# Altium PCB 对射光电IC款-RX接收-测试PCB-20260121.PcbDoc
Units mil, origin at the board's own origin, x right, y up, seen from the top; angles counter-clockwise.
Board outline 2124.44 x 1294.09 mil, 2 copper layers (Top, Bottom), stack 12.7 mil thick; 65 components, 34 nets, 170 pads, 83 vias.
Unrouted connection lines stored in the file: 95.
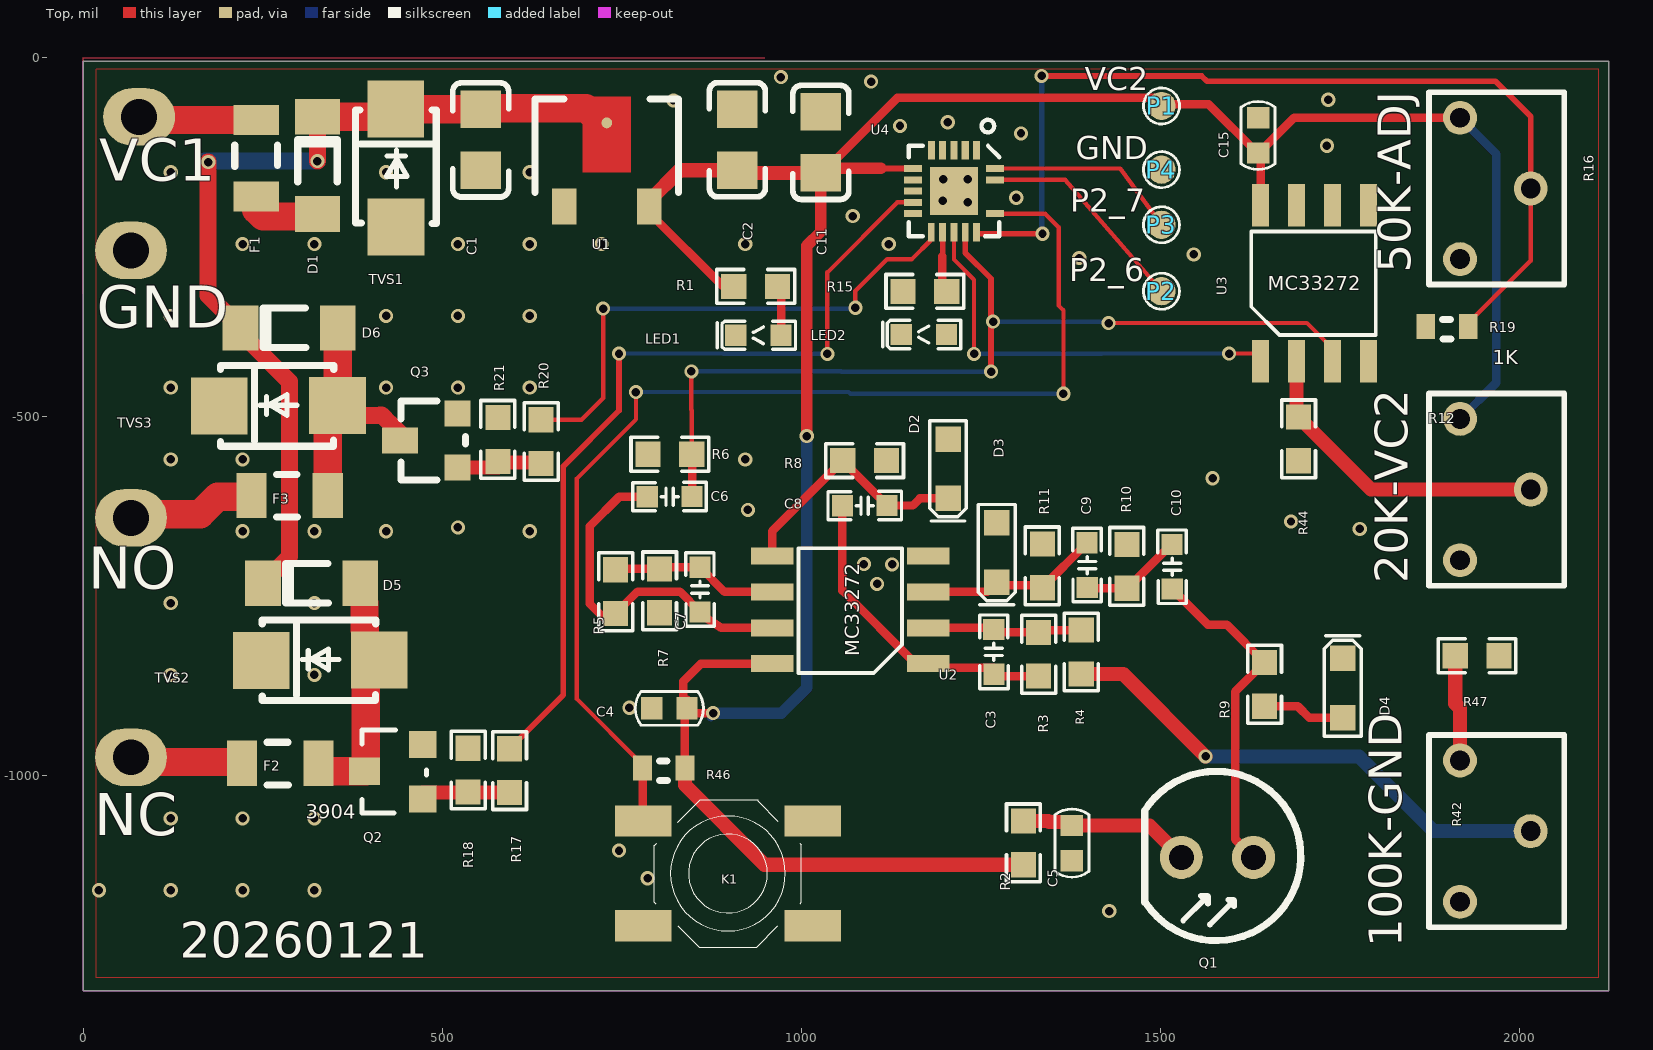
[diagram p0: Top view]
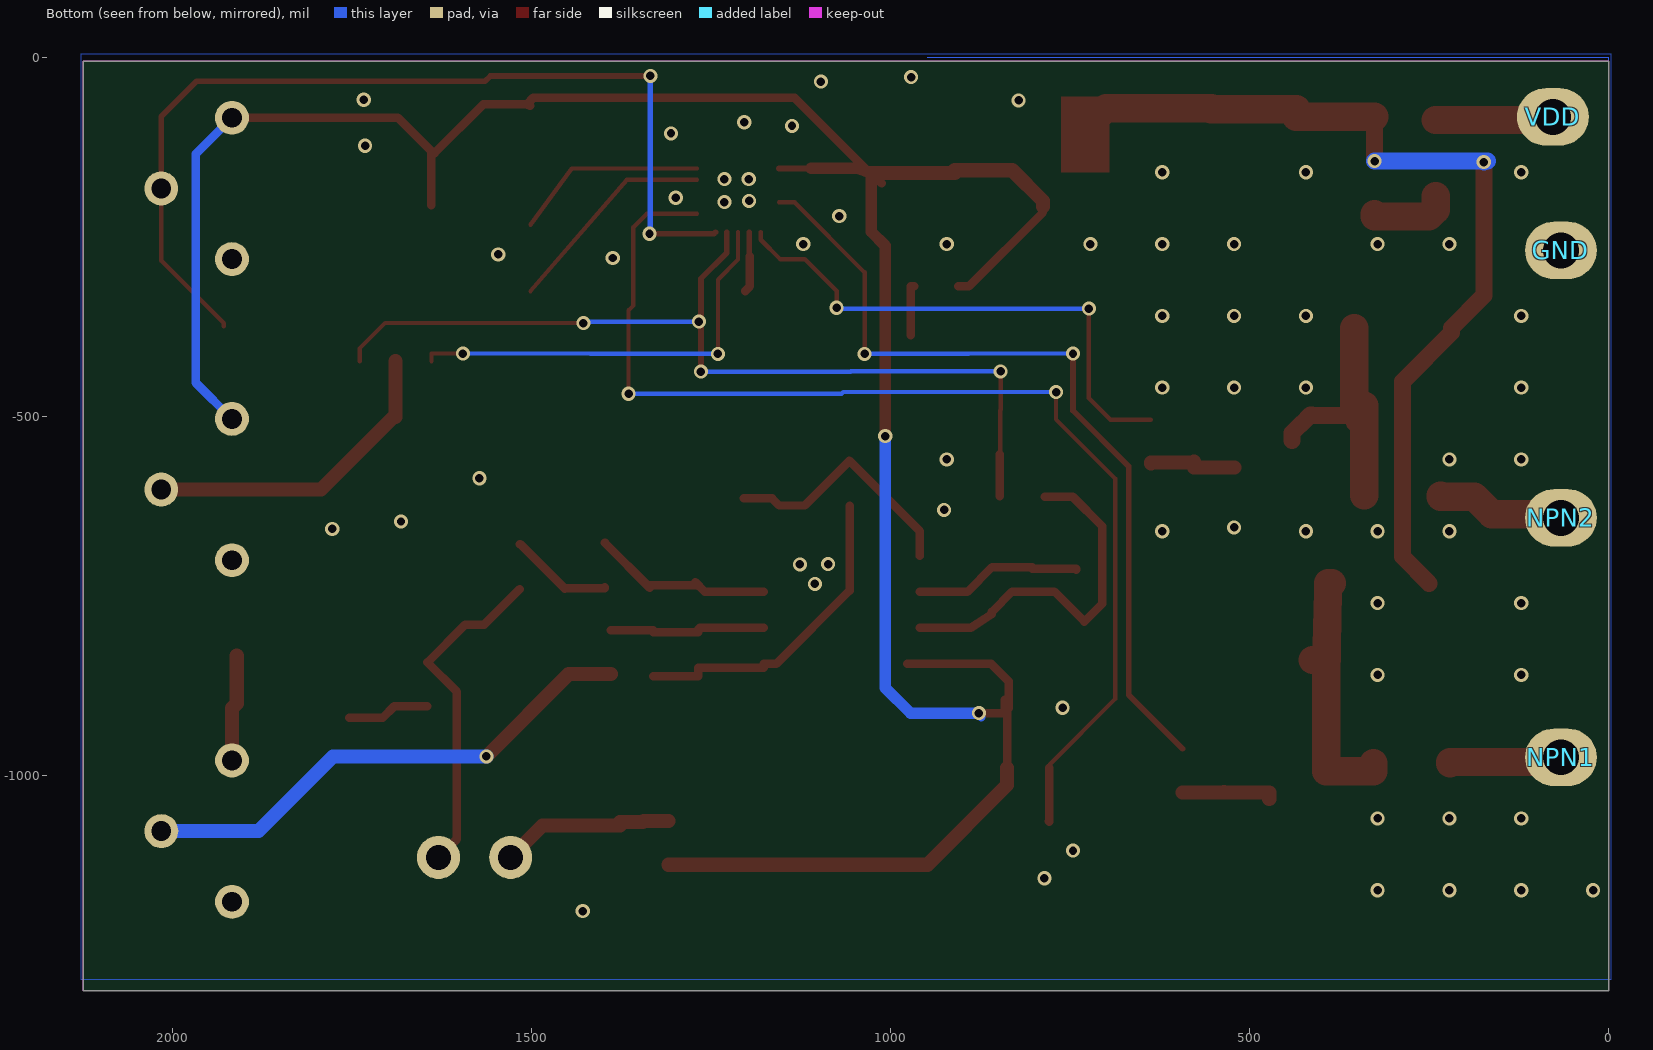
[diagram p1: Bottom view, seen from below]

## Layer stack, top to bottom
Solder Mask Top: solder mask 0.4, Solder Resist, Dk 3.5
Top: signal copper 1.35
Dielectric 1: dielectric 10, FR-4, Dk 4.3
Bottom: signal copper 1.35
Solder Mask Bottom: solder mask 0.4, Solder Resist, Dk 3.5

## Board outline
-0.03,-4.72 2124.41,-4.72 2124.41,-1298.82 -0.03,-1298.82

## Design rules (kind name [scope] priority, off if disabled: settings)
Clearance "Clearance - Default - DEFAULT- SMD" [IsVia vs IsSMTPin] p1: gap=6 ignorepadtopadclearanceinfootprint=FALSE
Clearance "Clearance - Default - DEFAULT - Via" [IsVia vs IsVia] p2: gap=6 ignorepadtopadclearanceinfootprint=FALSE
Clearance "Clearance - Default - DEFAULT - Net" [All] p3: gap=6 ignorepadtopadclearanceinfootprint=FALSE except(0: Arc-Hole Track-Hole SMDPad-Hole THPad-Hole Via-Hole Fill-Hole Poly-Hole Region-Hole Text-Hole; 10: Fill-Fill Fill-Poly Fill-Region Poly-Poly Poly-Region Region-Region Text-Text)
ComponentClearance "ComponentClearance - Default - DEFAULT" [All] p1: gap=6 collisioncheckmode=3 verticalgap=10 showdistances=FALSE
FanoutControl Fanout_Small [(CompPinCount < 5)] p3: bgadir=Out bgaviamode=Centered fanoutstyle=Auto fanoutdirection=OutThenIn viagrid=1 // Fanout_Small (Default Rule)
FanoutControl Fanout_SOIC [IsSOIC] p4: bgadir=Out bgaviamode=Centered fanoutstyle=Auto fanoutdirection=Alternating viagrid=1 // Fanout_SOIC (Default Rule)
HoleToHoleClearance "HoleToHoleClearance - Default - DEFAULT" [All] p1: gap=6 allowstackedmicrovias=TRUE
Length "Default Length" [All] p1: maxlimit=50000 minlimit=0
MaxMinImpedance "Default Impedance" [All] p1: minimum=50.00 maximum=150.0
ParallelSegment "Default Parallel Segment Adjasent" [All] p1: limit=1000 gap=200
ParallelSegment "Default Parallel Segment Same Layer" [All] p2: limit=1000 gap=200
PlaneConnect "Default PlaneConnect" [All] p1: planeconnectstyle=Direct reliefexpansion=20 reliefentries=4 reliefconductorwidth=15 reliefairgap=10
PolygonConnect "PolygonConnect - Default SMT" [IsSMTPin] p1: connectstyle=Direct reliefconductorwidth=10 reliefentries=4 polygonreliefangle="45 Angle" airgapwidth=10
PolygonConnect "PolygonConnect - Default Pad" [All] p2: connectstyle=Direct reliefconductorwidth=15 reliefentries=4 polygonreliefangle="45 Angle" airgapwidth=10
RoutingLayers "RoutingLayers - Default - DEFAULT" [All] p1: top layer_v5=TRUE bottom layer_v5=TRUE
RoutingPriority "RoutingPriority - Default - DEFAULT" [All] p1: routingpriority=3
RoutingTopology "Default Routing Topology" [All] p1: topology=Shortest
RoutingVias "RoutingVias - Default - DEFAULT" [All] p1: holewidth=11.81 width=19.68 viastyle="Through Hole" minholewidth=11.81 minwidth=19.68 maxholewidth=11.81 maxwidth=19.68
SMDToCorner "SMDToCorner - Default - DEFAULT" [All] p1: distance=60000
SolderMaskExpansion [All] p1: expansion=4 istentingtop=FALSE
Width "Default Width" [All] p1: maxlimit=6 minlimit=6 preferedwidth=6
20 further rules are at their usual default settings.

## Components (designator, comment, footprint, x,y, rotation, side; value= is the part's Value field where it differs from the comment)
C1 "0805C" 0805C 553.48,-71.76 r270 top
C2 "0805C" 0805C 910.81,-156.53 r90 top
C3 "0603C" 0603C 1268.04,-827.14 r90 top
C4 "C0603" C0603 816.26,-905.86 r180 top
C5 "CAP0603" CAP0603 1376.78,-1093.54 r270 top
C6 "0603C" 0603C 816.65,-610.98 r0 top
C7 "0603C" 0603C 858.89,-740.4 r270 top
C8 "0603C" 0603C 1088.27,-623.56 r180 top
C9 "0603C" 0603C 1397.92,-706.45 r90 top
C10 "0603C" 0603C 1516.38,-708.69 r270 top
C11 "0805C" 0805C 1027.13,-160.22 r90 top
C15 "C0603" C0603 1636.09,-108.05 r90 top
D1 "D1" D1 326.1,-217.57 r90 top
D2 "WSOD-323" WSOD-323 1204.33,-572.18 r90 top
D3 "WSOD-323" WSOD-323 1272.13,-688.92 r90 top
D4 "WSOD-323" WSOD-323 1753.94,-877.74 r270 top
D5 "D1" D1 385.68,-731.71 r180 top
D6 "D1" D1 354.43,-376.06 r180 top
F1 "1206" 1206 240.85,-192.92 r90 top
F2 "1206" 1206 327.68,-982.48 r180 top
F3 "1206" 1206 340.55,-609.61 r180 top
GND "P" P 66.54,-268.11 r180 bottom
K1 "SW-SMD_4P" SW-SMD_4P 897.76,-1135.87 r0 top
LED1 "0603LED" 0603LED 908.75,-386.32 r0 top
LED2 "0603LED" 0603LED 1139.11,-385.31 r0 top
NPN1 "P" P 66.54,-974.02 r180 bottom
NPN2 "P" P 66.54,-640.55 r180 bottom
P1 "TEST-POINT_D1.0" TEST-POINT_D1.0 1501.64,-66.97 r0 top
P2 "TEST-POINT_D1.0" TEST-POINT_D1.0 1501.54,-325 r0 top
P3 "TEST-POINT_D1.0" TEST-POINT_D1.0 1501.54,-232.48 r0 top
P4 "TEST-POINT_D1.0" TEST-POINT_D1.0 1501.54,-155.71 r0 top
Q1 "RX-LEDDIP1" RX-LEDDIP1 1529.17,-1113.49 r0 top
Q2 "SOT23$2F$2" SOT23$2F$2 472.7,-1033.5 r270 top
Q3 "SOT23" SOT23 482.29,-532.78 r90 top
R1 "R0603" R0603 905.89,-318.39 r0 top
R2 "R0603" R0603 1309.36,-1062.66 r270 top
R3 "R0603" R0603 1330.45,-861.07 r90 top
R4 "R0603" R0603 1389.83,-858.04 r90 top
R5 "R0603" R0603 741.38,-712.79 r270 top
R6 "R0603" R0603 786.33,-551.95 r0 top
R7 "R0603" R0603 802.57,-711.7 r270 top
R8 "R0603" R0603 1118.72,-560.77 r180 top
R9 "R0603" R0603 1645.04,-902.97 r90 top
R10 "R0603" R0603 1453.36,-677.55 r270 top
R11 "R0603" R0603 1335.67,-738.03 r90 top
R12 "3266_3PIN" 3266_3PIN#1 1917.32,-502.76 r270 top
R15 "R0603" R0603 1141.44,-325.29 r0 top
R16 "3266_3PIN" 3266_3PIN#1 1917.32,-83.46 r270 top
R17 "R0603" R0603 593.61,-1023.22 r90 top
R18 "R0603" R0603 535.91,-1022.42 r90 top
R19 "0603" 0603 1928.76,-373.88 r270 top
R20 "R0603" R0603 637.63,-564.92 r90 top
R21 "R0603" R0603 577.41,-561.89 r90 top
R42 "3266_3PIN" 3266_3PIN#2 1917.23,-978.43 r270 top
R44 "R0603" R0603 1692.41,-500.04 r270 top
R46 "0603" 0603 837.87,-988.8 r270 top
R47 "R0603" R0603 1971.65,-832.57 r180 top
TVS1 "D2" D2 435.56,-235.6 r180 top
TVS2 "D2" D2 412.34,-838.64 r270 top
TVS3 "D2" D2 353.93,-484.28 r270 top
U1 "SOT89" SOT89 729.04,-127.12 r0 top
U2 "MC33272_SOP8" MC33272_SOP8 1176.74,-843.72 r90 top
U3 "MC33272_SOP8" MC33272_SOP8 1639.52,-422.51 r0 top
U4 "UM8004" UM8004 1212.52,-185.56 r270 top
VDD "P" P 77.75,-82.16 r180 bottom

## Footprints (in the part's own frame and the unit in brackets; to place one, negate y for a bottom-side part, rotate by r counter-clockwise, add the part's x,y. Pads: shape width x height; smd on the part's side, far side on the other; paste and mask are expansions set on the pad)
0603 [mil]
  rect 35x26 smd: 1(0,0) 2(0,-59)
  silkscreen extent -9,-36 18,-24
0603C [mm]
  rect 0.75x0.75 smd: 1(-0.791,-0.004) 2(0.791,0.004)
  round 0 all layers, no hole: $$$1(0,0)
  silkscreen extent -1.3,-0.5 1.3,0.5
0603LED [mm]
  rect 0.75x0.75 smd: 1(1.6,0) 2(0,0)
  round 0 all layers, no hole: $$$1(0,0)
  silkscreen extent -0.65,-0.5 2.11,0.5
0805C [mil]
  rect 52x56 smd: 1(0,0) 2(85,0)
  silkscreen extent -37,-39 122,39
1206 [mil]
  rect 42x63 smd: 1(0,0) 2(106.5,0)
  silkscreen extent 42,-29 72,30
3266_3PIN#1 [mm]
  round 1.2 hole 0.7: 1(0,0) 2(5,0) 3(2.5,2.5)
  silkscreen extent -0.9,-1.1 5.9,3.69
3266_3PIN#2 [mm]
  round 1.2 hole 0.7: 1(5,0) 2(2.5,2.5) $$$1(0,0)
  silkscreen extent -0.9,-1.1 5.9,3.69
C0603 [mm]
  rect 0.75x0.8 smd: 1(-0.625,0) 2(0.625,0)
  silkscreen extent -1.21,-0.6 1.21,0.6
CAP0603 [mm]
  rect 0.75x0.8 smd: 1(-0.625,0) 2(0.625,0)
  silkscreen extent -1.21,-0.6 1.21,0.6
D1 [mil]
  rect 50x63 smd: 1(0,0) 2(135.5,0)
  silkscreen extent 44,-27 104,28
D2 [mil]
  rect 79x79 smd: 1(0,0) 2(0.5,-164.5)
  silkscreen extent -56,-163 57,-5
MC33272_SOP8 [mm]
  rect 0.6x1.5 smd: 1(0,0) 2(1.27,0) 3(2.54,0) 4(3.81,0) 5(3.81,5.52) 6(2.54,5.52) 7(1.27,5.52) 8(0,5.52)
  silkscreen extent -0.33,0.93 4.08,4.59
P [mil]
  oval 100x80 hole 50: 1(0,0)
R0603 [mil]
  rect 35x35 smd: 1(0,0) 2(61.02,0)
  silkscreen extent -24,-24 85,24
RX-LEDDIP1 [mil]
  round 60 hole 35: 1(0,0) 2(100.5,0)
  silkscreen extent -51,-116 166,120
SOT23 [mil]
  rect 36x36 smd: 1(-37.5,-39) 2(37.5,-39)
  rect 36x50 smd: 3(0,41)
  silkscreen extent -55,-50 55,40
SOT23$2F$2 [mil]
  rect 38x38 smd: 1(-1.5,0) 2(-77.2,0)
  rect 38x43 smd: 3(-40,-81.1)
  silkscreen extent -98,-84 18,5
SOT89 [mil]
  rect 34x50 smd: 1(-59,-80) 3(59,-80)
  round 15 smd: 2(0,36.5)
  Top region: -17,-31.89 -17,-32 -33.5,-32 -33.5,73 33.5,73 33.5,-32 17,-32 17,-31.89 -17,-31.89
  silkscreen extent -100,-60 100,70
SW-SMD_4P [mm]
  rect 2x1.1 smd: 1(-3,1.85) 2(3,1.85) 3(-3,-1.85) 4(3,-1.85)
  silkscreen extent -2.6,-2.6 2.6,2.6
TEST-POINT_D1.0 [mm]
  round 1 smd: 1(0,0)
  silkscreen extent -0.64,-0.64 0.64,0.64
UM8004 [mm]
  rect 0.65x0.25 smd: 1(-1.45,0.8) 2(-1.45,0.4) 3(-1.45,0) 4(-1.45,-0.4) 5(-1.45,-0.8) 19(1.45,0.8)
  rect 0.25x0.65 smd: 6(-0.8,-1.45) 7(-0.4,-1.45) 8(0,-1.45) 9(0.4,-1.45) 10(0.8,-1.45) 16(0.8,1.45) 19(-0.4,1.45) 20(-0.8,1.45)
  rect 0.65x0.24 smd: 11(1.45,-0.8) 12(1.45,-0.4) 13(1.45,0) 14(1.45,0.4)
  rrect0% 1.7x1.7 smd: 21(0,0)
  silkscreen extent -2.52,-1.6 1.6,1.6
WSOD-323 [mm]
  rect 0.9x0.9 smd: 1(1.05,0) 2(-1.05,0)
  round 0 all layers, no hole: $$$1(0,0)
  silkscreen extent -1.85,-0.65 1.7,0.65

## Via types
v1: diameter 19.68, hole 11.81, Top to Bottom, 83 vias

## Nets (pads, with @x,y where several pads share a name; then routed paths per layer and width w, separated by ;. In a path a pad name is that pad's centre, name@x,y a point inside that pad or via, vN(x,y) a via of type N, cw(c..) or ccw(c..) an arc to the next point about the centre after c; other vN are vias at no path point)
$$$3: C3.2 R3.2 R4.2 U2.2 | length 221.1
  Top w11.81: U2.2 1265.59,-793.72 C3.2 1267.89,-800.05 R3.2 1330.45,-797.02 R4.2
$$$5: C6.1 C7.2 R5.2 U2.7 | length 520.9
  Top w7.87: U2.7@945.65,-793.72 U2.7
  Top w11.81: C6.1 746.52,-611.13 705.51,-652.13 705.51,-760.36 730.17,-785.02 R5.2 771.88,-743.31 830.82,-743.31 C7.2 859.04,-774.57 888.21,-793.72 U2.7
$$$7: F2.2 NPN1.1 | length 157.5
  Top w39.37: NPN1.1 89.28,-980.55 221.18,-980.55 F2.2
$$$8: C5.1 Q1.1 R2.1 | length 243.8
  Top w19.68: R2.1 1343.84,-1062.66 1345.19,-1064.01 1376.78,-1064.01 C5.1 1484.61,-1068.94 Q1.1
$$$10: LED1.1 R1.2 | length 72.8
  Top w11.81: R1.2 971.74,-318.39 LED1.1
$$$11: D5.1 F2.1 Q2.3 TVS2.1 | length 382.6
  Top w39.37: F2.1 327.68,-993.5 Q2.3 393.34,-993.5 393.34,-838.64 TVS2.1 392.52,-838.64 392.52,-818.83 391,-743.52 391,-731.71 D5.1
$$$12: Q2.1 R17.1 R18.1 | length 131.3
  Top w19.68: Q2.1 472.7,-1022.84 535.91,-1022.84 R18.1 535.91,-1023.22 R17.1
$$$16: R17.2 U4.9 | length 1198.5
  Top w6: R17.2 R17.2@605.02,-950.79 ; v1(1036.22,-412.2) 1036.22,-298.73 1133.64,-201.3 U4.9
  Top w7.87: R17.2 668.5,-887.3 668.5,-568.9 746.06,-491.34 v1(746.06,-411.81)
  Bottom w6: v1(746.06,-411.81) 890.94,-411.81 891.34,-412.2 v1(1036.22,-412.2)
  Bottom w7.87: v1@1032.68,-414.17 1036.22,-414.17 v1(1036.22,-412.2)
$$$17: Q3.1 R20.1 R21.1 | length 127.8
  Top w19.68: Q3.1 577.41,-570.28 R21.1 577.41,-563.41 637.63,-563.41 R20.1
$$$18: R20.2 U4.11 | length 745.6
  Top w6: R20.2 693.77,-503.9 724.02,-473.65 v1(724.02,-349.21) ; v1(1075.2,-348.03) 1075.2,-324.8 1119.69,-280.32 1153.94,-280.32 1181.03,-253.22 U4.11
  Bottom w6: v1(724.02,-349.21) 1033.07,-349.21 1033.46,-349.61 1075.2,-349.61 v1(1075.2,-348.03)
$$$22: F3.2 NPN2.1 | length 179.7
  Top w39.37: NPN2.1 87.13,-635.57 162.82,-635.57 187.37,-611.03 234.05,-611.03 F3.2
$$$24: F1.2 VDD.1 | length 186.3
  Top w39.37: VDD.1@66.43,-74.57 66.43,-86.42 F1.2
$$$25: D1.1 F1.1 | length 110.9
  Top w39.37: F1.1 240.94,-193.02 240.94,-211.42 250.39,-220.87 326.1,-220.87 D1.1
$$$26: R15.2 U4.12 | length 86.2
  Top w7.87: 1196.06,-276.38 1196.85,-276.38 1196.85,-242.64 U4.12
  Top w11.81: 1196.06,-276.38 1196.06,-318.11 1202.46,-324.51 R15.2
$$$31: K1.1 R46.2 U4.16 | length 1598.9
  Top w6: v1(769.69,-465.35) 769.69,-503.44 687.4,-585.72 687.4,-892.84 778.87,-984.3 R46.2 ; U4.16 1339.49,-217.05 1358.27,-235.83 1358.27,-345 1364.96,-351.7 v1(1364.96,-467.72)
  Top w11.81: R46.2 778.87,-1063.82 K1.1
  Bottom w6: v1(769.69,-465.35) 1066.14,-465.35 1068.5,-467.72 v1(1364.96,-467.72)
$$$2959: R12.3 R44.1 U3.2 | length 445.7
  Top w7.87: R44.1@1689.52,-500.04 R44.1
  Top w19.68: R44.1@1689.52,-500.04 U3.2 ; R44.1 1793.55,-601.18 R12.3
$$$9255: D4.1 R9.1 | length 115.6
  Top w11.81: R9.1 1691.33,-902.97 1707.44,-919.08 D4.1
$$$9261: C9.1 C10.1 R10.2 | length 145.7
  Top w11.81: C9.1 1398.07,-738.57 R10.2 1453.83,-738.57 1453.83,-739.04 1515.76,-677.1 1515.76,-677.57 C10.1
$$$9367: C9.2 D3.2 R11.1 U2.3 | length 261.1
  Top w11.81: U2.3 1258.67,-743.72 D3.2 1272.13,-734.22 1335.67,-734.22 R11.1 1335.52,-738.03 1335.52,-737.88 1397.92,-675.48 1397.92,-675.33 C9.2
$$$11997: C8.1 D2.2 R8.2 U2.5 | length 351.6
  Top w11.81: U2.5 959.41,-659.05 R8.2 1057.69,-561 1057.46,-561 1119.63,-623.17 1119.4,-623.17 C8.1 1155.33,-623.41 1165.22,-613.52 D2.2
$$$15474: R4.1 | length 716.5
  Top w19.68: R4.1 1448.2,-858.04 v1(1562.99,-972.83)
  Bottom w19.68: v1(1562.99,-972.83) 1776.38,-972.83 1880.4,-1076.85 2015.66,-1076.85
$$$16659: C3.1 C8.2 R3.1 U2.1 | length 451
  Top w6: C3.1@1268.19,-861.07 C3.1
  Top w11.81: C8.2 1057.15,-741.85 1159.02,-843.72 U2.1 1176.74,-849.54 1268.19,-849.54 C3.1 ; C3.1@1268.19,-861.07 R3.1
$$$17164: C7.1 R5.1 R7.1 U2.6 | length 235.8
  Top w11.81: R5.1 741.38,-711.7 R7.1 802.57,-709.28 C7.1 893.19,-743.72 U2.6
$$$27529: C10.2 Q1.2 R9.2 | length 469.7
  Top w11.81: C10.2 1566.23,-789.51 1592.61,-789.51 R9.2 1604.33,-882.66 1604.33,-1088.15 Q1.2
$$$28779: R16.3 R19.1 | length 1345.5
  Top w6: R19.1 1928.76,-369.38 2015.75,-282.4 R16.3
  Top w7.87: 1244.02,-242.64 1246.26,-244.88 v1(1335.83,-244.88) ; v1(1334.65,-25.2) 1557.41,-25.2 1564.89,-32.68 1966.54,-32.68 2015.75,-81.89 R16.3
  Bottom w7.87: v1(1334.65,-25.2) 1334.65,-243.7 v1(1335.83,-244.88)
$$$28985: R42.1 R47.2 | length 148.6
  Top w19.68: R47.2 1910.63,-899.13 1917.23,-905.74 1917.23,-978.43
GND2: C1.2 C2.2 C4.2 C5.2 C11.2 C15.2 D2.1 D3.1 D4.2 GND.1 K1.3 LED1.2 LED2.2 P4.1 Q2.2 Q3.2 R6.1 R7.2 R8.1 R10.1 R11.2 R18.2 R19.2 R21.2 R44.2 R47.1 TVS1.1 TVS2.2 TVS3.2 U1.1 U2.4 U3.4 U4.4 U4.21
  other v1: 1428.74,-1188.19 21.82,-1159.26 121.82,-1159.26 221.82,-1159.26 321.82,-1159.26 785.83,-1142.52 746.06,-1103.94 121.82,-1059.26 221.82,-1059.26 321.82,-1059.26 760.63,-905.12 121.82,-859.26 321.82,-859.26 121.82,-759.26 321.82,-759.26 1105.51,-732.68 1126.38,-705.51 1087.01,-705.12 221.82,-659.26 321.82,-659.26 421.82,-659.26 621.82,-659.26 1777.56,-655.91 521.65,-653.94 1681.89,-645.67 925.59,-629.53 1572.83,-585.43 121.82,-559.26 221.82,-559.26 921.82,-559.26 121.82,-459.26 421.82,-459.26 521.82,-459.26 621.82,-459.26 121.82,-359.26 421.82,-359.26 521.82,-359.26 621.82,-359.26 1387.01,-278.74 1546.46,-273.62 221.82,-259.26 321.82,-259.26 521.82,-259.26 621.82,-259.26 721.82,-259.26 921.82,-259.26 1121.82,-259.26 1071.65,-220.47 1231.5,-200.79 1197.24,-199.21 1299.21,-194.88 1197.64,-168.9 1231.5,-168.9 121.82,-159.26 421.82,-159.26 621.82,-159.26 1731.89,-122.44 1305.91,-105.12 1137.4,-94.88 1203.94,-89.76 821.82,-59.26 1733.86,-58.27 1097.24,-33.07 971.65,-26.77
NET_D4_1: D6.1 F3.1 Q3.3 TVS3.1 | length 413.8
  Top w23.62: TVS3.1@353.93,-508.27 TVS3.1@353.93,-498.21 ; Q3.3 441.29,-522.4 428.55,-509.66 427.95,-509.66 415.35,-497.06 415.15,-497.06 414.96,-497.24 413.17,-497.24 412.2,-498.21 TVS3.1@353.93,-498.21 ; TVS3.1@353.93,-498.21 TVS3.1 340.55,-497.66 340,-498.21 340.55,-498.21 TVS3.1@353.93,-498.21
  Top w39.37: F3.1 340.55,-498.21 340.55,-497.66 340.55,-484.28 TVS3.1 354.43,-484.28 D6.1
P2_6: P2.1 U4.19 | length 302.9
  Top w6: U4.19@1269.61,-169.81 1367.45,-169.81 P2.1
P2_7: P3.1 U4.20 | length 271.7
  Top w6: U4.20 1444.22,-154.06 P3.1
U2-13: U3.1 U4.13 | length 591
  Top w6: U4.13 1212.52,-280.88 1240.55,-308.9 v1(1240.55,-412.2) ; v1(1595.67,-411.81) 1639.52,-411.81 U3.1
  Bottom w6: v1(1240.55,-412.2) 1417.91,-412.2 1418.31,-411.81 v1(1595.67,-411.81)
U3-1: C6.2 R6.2 U3.3 U4.14 | length 1310.9
  Top w6: v1(846.85,-436.61) 846.85,-490.2 847.35,-490.71 R6.2 R6.2@847.78,-551.95 ; v1@1264.17,-366.54 1266.93,-366.54 v1(1266.93,-367.32) ; v1(1427.95,-369.29) 1704.01,-369.29 1739.52,-404.8 U3.3
  Top w7.87: U4.14 1228.27,-271.58 1264.17,-307.48 1264.17,-366.54 v1(1264.17,-437.01)
  Top w11.81: C6.2 R6.2@847.78,-551.95
  Bottom w6: v1(846.85,-436.61) 1055.31,-436.61 1055.71,-437.01 v1(1264.17,-437.01) ; v1(1266.93,-367.32) 1425.98,-367.32 v1(1427.95,-369.29)
VC1: C1.1 D1.2 D5.2 D6.2 TVS1.2 U1.2 | length 1317.4
  Top w23.62: v1(174.02,-145.28) 174.02,-331.14 D6.2 218.93,-382.56 287.4,-451.03 287.4,-694.49 D5.2 ; v1(325.98,-143.7) 325.98,-82.07 D1.2
  Top w39.37: D1.2 435.06,-82.07 TVS1.2 435.06,-71.76 C1.1 553.48,-70.01 700,-70.01 715.22,-85.23 715.22,-104.43 U1.2
  Bottom w23.62: v1@168.9,-143.7 v1@172.44,-143.7 ; v1(174.02,-145.28) v1@172.44,-143.7 ; v1(325.98,-143.7) v1@172.44,-143.7
VC2: C2.1 C4.1 C11.1 C15.1 P1.1 R1.1 R2.2 R12.1 R16.1 R46.1 U1.3 U2.8 U3.8 U4.6 | length 3873.9
  Top w8.66: 1111.02,-153.94 1155.31,-153.94 U4.6
  Top w11.81: U1.3 788.04,-215.12 891.31,-318.39 R1.1 ; R46.1 837.87,-908.86 C4.1 835.83,-905.86 835.83,-868.11 860.21,-843.72 U2.8 U2.8@977.13,-843.72 ; C4.1@840.86,-893.7 840.86,-912.6 v1(877.17,-912.6) ; C11.1@1012.6,-174.76 C11.1 1029.13,-160.22 1133.86,-55.5 1497.8,-55.5 1507.12,-64.82 P1.1 1503.96,-64.64 1567.09,-64.64 1635.11,-132.66 C15.1 ; U3.8 1639.52,-132.66 C15.1 ; R16.1 1686.27,-83.46 1637.08,-132.66 C15.1
  Top w15.75: v1(1007.48,-526.77) 1007.48,-261.68 1027.13,-242.03 C11.1 1045.67,-153.94 1111.02,-153.94
  Top w19.68: U1.3 788.04,-199.12 830.63,-156.53 C2.1 910.81,-160.22 C11.1 ; R46.1 837.87,-1012.74 948.82,-1123.69 R2.2
  Bottom w11.81: v1@874.02,-918.11 v1(877.17,-912.6) ; R12.1 1967.72,-452.36 1967.72,-133.86 R16.1
  Bottom w15.75: v1(877.17,-912.6) 972.44,-912.6 1007.48,-877.56 v1(1007.48,-526.77)
pads on no net: C3.$$$1 C6.$$$1 C7.$$$1 C8.$$$1 C9.$$$1 C10.$$$1 D2.$$$1 D3.$$$1 D4.$$$1 K1.2 K1.4 LED1.$$$1 LED2.1 LED2.$$$1 R12.2 R15.1 R16.2 R42.2 R42.$$$1 U3.5 U3.6 U3.7 U4.1 U4.2 U4.3 U4.5 U4.7 U4.8 U4.10

## Polygon pours and split planes (outlines as drawn)
GND2 on Bottom (solid, remove dead copper, pour order 0): -3.54,4.72 2127.95,4.72 2127.95,-1283.46 -3.54,-1283.46
GND2 on Top (solid, remove dead copper, pour order 1): 18.31,-15.28 2109.65,-15.28 2109.65,-1281.03 18.31,-1281.03

## Keep-outs
Keep-Out Layer:
  the board outline again, w0.39

## Other copper
Multi-Layer:
  lines w1: -0.03,-328.74 -0.03,0 948.79,0

## Silkscreen, mask and mechanical layers (free items; w line width, h text height)
Silkscreen Top:
  text "VC2" at 1394.49,-56.3 h55.12
  text "GND" at 1382.28,-152.36 h55.12
  text "VC1" at 22.05,-190.94 h100
  text "P2_7" at 1374.41,-225.2 h55.12
  text "50K-ADJ" at 1864.17,-299.61 h78.74 r90
  text "P2_6" at 1372.83,-322.44 h55.12
  text "MC33272" at 1649.61,-323.62 h19.68
  text "GND" at 18.5,-395.67 h100
  text "1K" at 1962.6,-426.38 h19.68
  text "20K-VC2" at 1859.84,-731.89 h78.74 r90
  text "NO" at 6.69,-758.66 h100
  text "MC33272" at 1080.71,-833.07 h19.68 r90
  text "3904" at 309.84,-1059.45 h19.68
  text "NC" at 14.96,-1102.36 h100
  text "100K-GND" at 1851.57,-1238.58 h78.74 r90
  text "20260121" at 134.25,-1253.15 h50
Drill Drawing:
  lines w1: 93.05,-1299.36 93.07,-1299.36 ; 2119.5,-46.85 2119.53,-46.85 ; -0.03,0 0,0 ; -0.03,0 0,0
  lines w10: -279.16,-1299.36 43.05,-1299.36 ; -279.16,0 -50.03,0 ; -229.16,-717.18 -229.16,-1299.36 ; -229.16,-582.18 -229.16,0 ; -0.03,50 -0.03,465.75 ; 872.92,415.75 -0.03,415.75 ; 1246.56,415.75 2119.5,415.75 ; 2119.5,3.15 2119.5,465.75 ; -229.16,-1299.36 -204.16,-1199.36 -254.16,-1199.36 -229.16,-1299.36 ; -229.16,0 -254.16,-100 -204.16,-100 -229.16,0 ; -0.03,415.75 99.97,390.75 99.97,440.75 -0.03,415.75 ; 2119.5,415.75 2019.5,440.75 2019.5,390.75 2119.5,415.75
  text "53.8mm" at 902.92,378.25 h50
  text "33.0mm" at -384.84,-687.18 h50